# Altium PCB Buck_Converter_PCB_4.PcbDoc
Units mm, origin at the board's own origin, x right, y up, seen from the top; angles counter-clockwise.
Board outline 150 x 100 mm, 2 copper layers (Top Layer, Bottom Layer); 59 components, 30 nets, 152 pads, 19 vias.
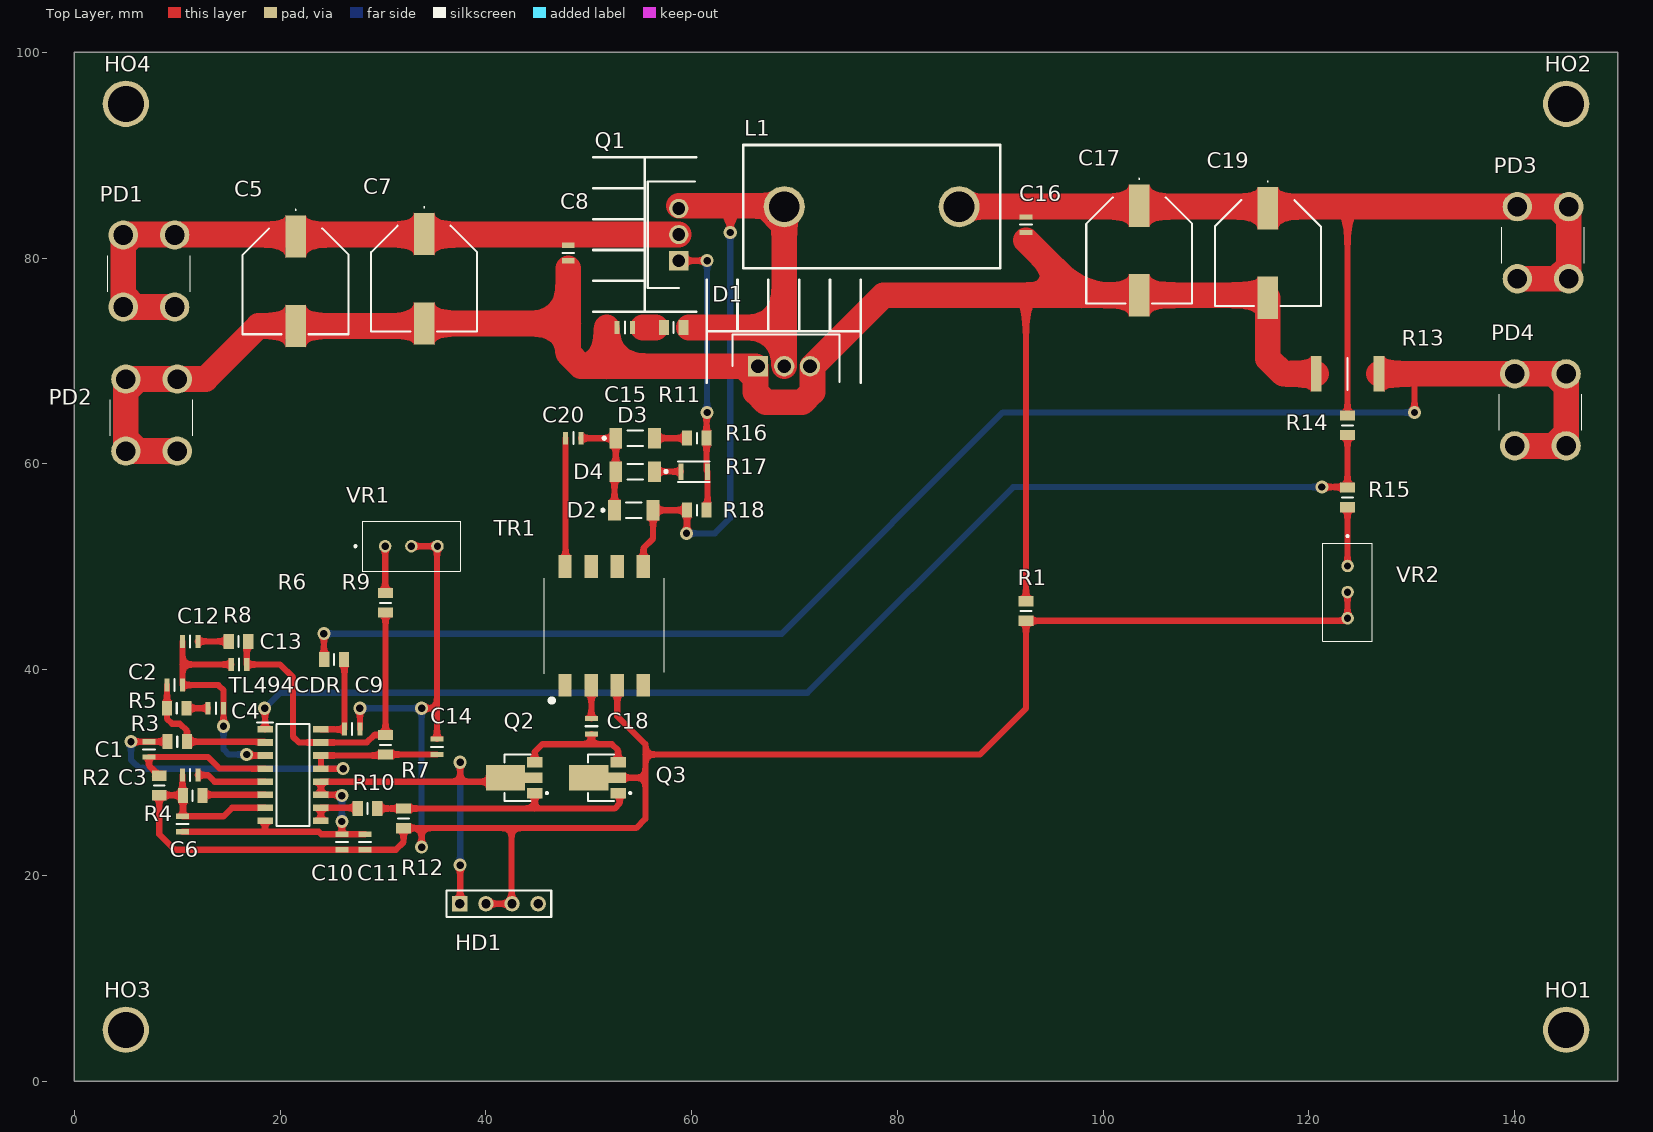
[diagram p0: Top Layer view]
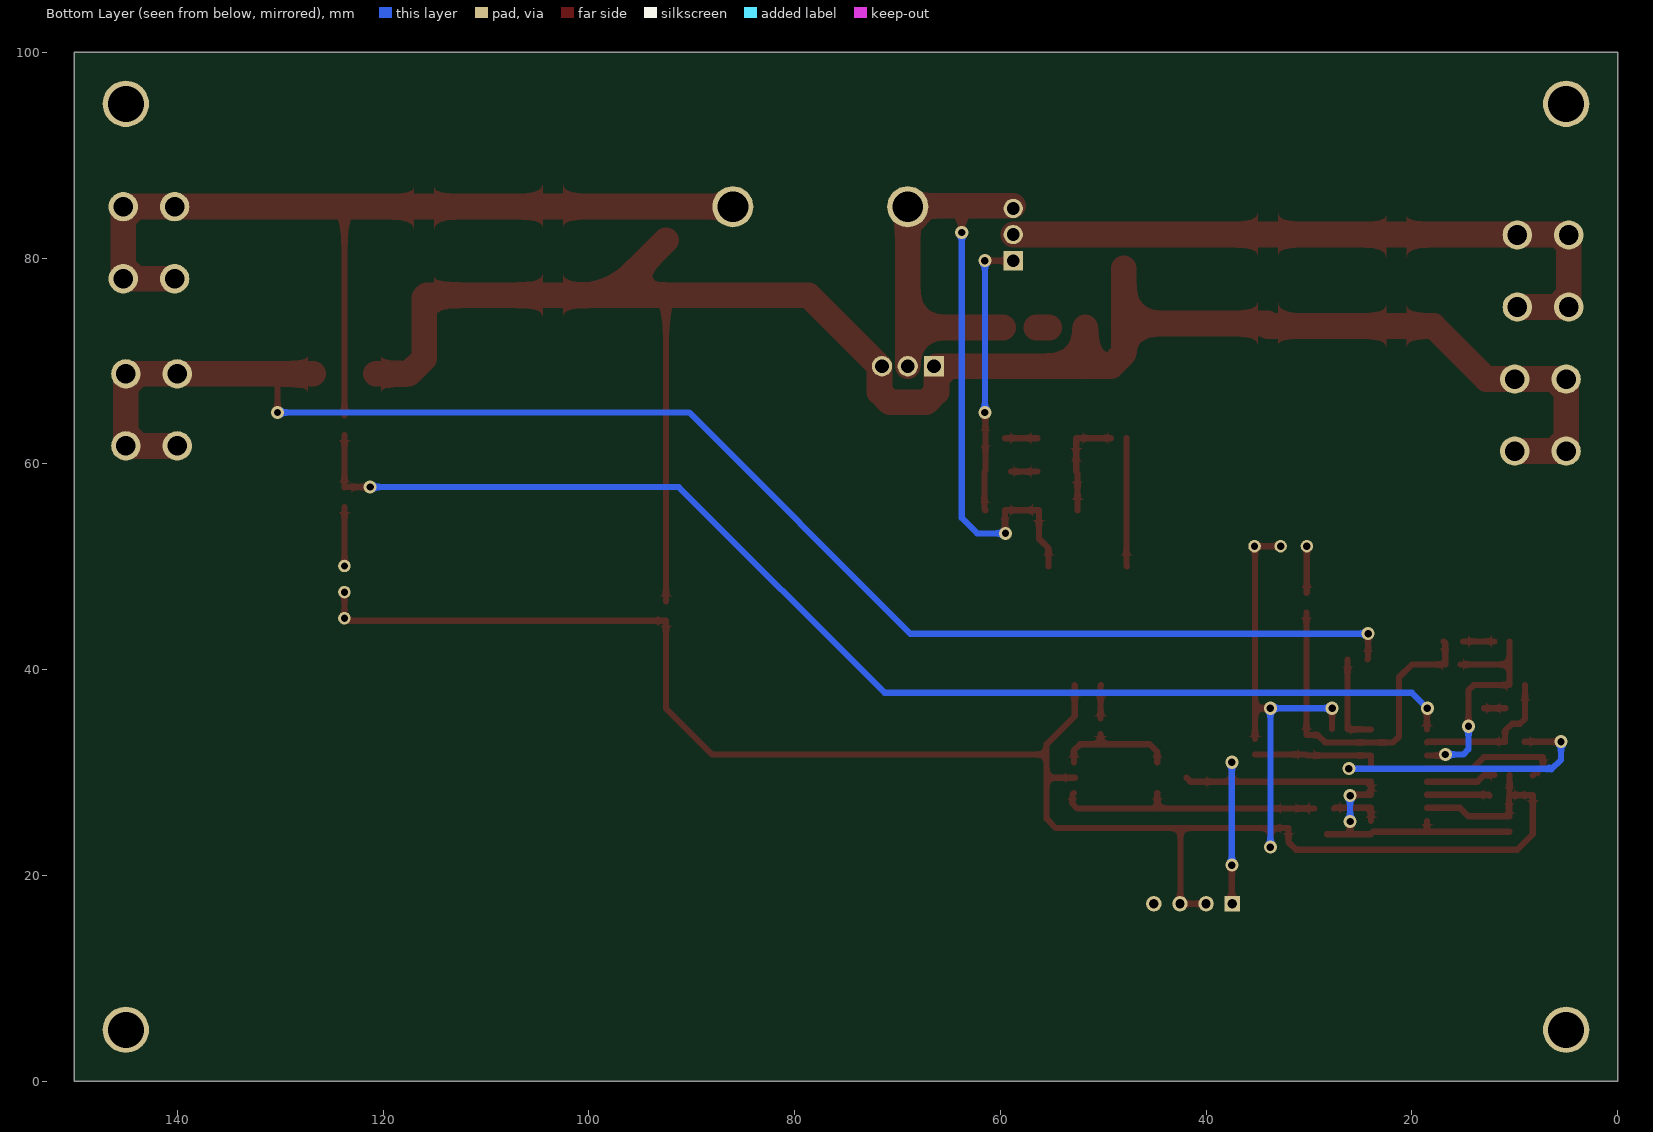
[diagram p1: Bottom Layer view, seen from below]

## Layer stack, top to bottom
Top Solder: solder mask 0.0102, Solder Resist, Dk 3.5
Top Layer: signal copper 0.0356
Dielectric 1: dielectric 0.32, FR-4, Dk 4.8
Bottom Layer: signal copper 0.0356
Bottom Solder: solder mask 0.0102, Solder Resist, Dk 3.5

## Board outline
0,0 150,0 150,100 0,100

## Design rules (kind name [scope] priority, off if disabled: settings)
Clearance [All] p1: gap=0.01
ComponentClearance [All] p1: gap=0.01 collisioncheckmode=3 verticalgap=0.254 showdistances=FALSE
HoleSize [All] p1: absolutevalues=TRUE maxlimit=4 minlimit=0.001 maxpercent=80.000 minpercent=20.000
MinimumSolderMaskSliver [All] p1: minsoldermaskwidth=0.001
PolygonConnect [All] p1: connectstyle=Relief reliefconductorwidth=0.254 reliefentries=4 polygonreliefangle="90 Angle" airgapwidth=0.254
RoutingVias [All] p1: holewidth=0.711 width=1.27 viastyle="Through Hole" minholewidth=0.711 minwidth=1.27 maxholewidth=0.711 maxwidth=1.27
SilkToSilkClearance [All] p1: silktosilkclearance=0.001
SilkToSolderMaskClearance [IsPad] p1: minsilkscreentomaskgap=0.001 clearancetoexposedcopper=TRUE
SolderMaskExpansion [All] p1: expansion=0.102
Width [All] p1: maxlimit=2.5 minlimit=0.254 preferedwidth=0.254
25 further rules are at their usual default settings.

## Components (designator, comment, footprint, x,y, rotation, side; value= is the part's Value field where it differs from the comment)
C1 "1uF" Capacitors_SMD_0805 7.25,32.25 r90 top
C2 "150pF" Capacitors_SMD_0805 9.75,38.5 r0 top
C3 "1nF" Capacitors_SMD_0805 11.25,29.75 r0 top
C4 "100nF" Capacitors_SMD_0805 13.75,36.25 r0 top
C5 "330uf" Capacitors_SMD_D10 21.5,77.75 r270 top
C6 "1uF" Capacitors_SMD_0805 10.5,25 r270 top
C7 "330uf" Capacitors_SMD_D10 34,78 r270 top
C8 "100nF" Capacitors_SMD_0805 48,80.5 r270 top
C9 "1nF" Capacitors_SMD_0805 27,34.25 r180 top
C10 "1uF" Capacitors_SMD_0805 26,23.25 r90 top
C11 "100nF" Capacitors_SMD_0805 28.25,23.25 r90 top
C12 "100nF" Capacitors_SMD_0805 11.25,42.75 r180 top
C13 "680pF" Capacitors_SMD_0805 16,40.5 r0 top
C14 "100nF" Capacitors_SMD_0805 35.25,32.5 r90 top
C15 "1nF" Capacitors_SMD_0805 53.5,73.25 r180 top
C16 "100nF" Capacitors_SMD_0805 92.5,83.25 r90 top
C17 "330uF" Capacitors_SMD_D10 103.5,80.75 r270 top
C18 "100nF" Capacitors_SMD_0805 50.25,34.5 r90 top
C19 "330uF" Capacitors_SMD_D10 116,80.5 r270 top
C20 "100nF" Capacitors_SMD_0805 48.5,62.5 r0 top
D1 "STPS20H100C" TO-220_Diode 69,69.5 r0 top
D2 "1N4148" 1N4148 54.375,55.5 r0 top
D3 "1N4148" 1N4148 54.5,62.5 r0 top
D4 "1N4148" 1N4148 54.5,59.25 r180 top
HD1 "Header 4" HDR1X4 37.46,17.25 r0 top
HO1 "HOLE" Hole 145,5 r0 top
HO2 "HOLE" Hole 145,95 r0 top
HO3 "HOLE" Hole 5,5 r0 top
HO4 "HOLE" Hole 5,95 r0 top
L1 "Inductor" Inductor 77.5,85 r0 top
PD1 "Terminal" Terminal 4.75,75.25 r0 top
PD2 "Terminal" Terminal 5,61.25 r0 top
PD3 "Terminal" Terminal 140.25,78 r0 top
PD4 "Terminal" Terminal 140,61.75 r0 top
Q1 "N-MOSFET" TO-220)N-MOSFET 58.75,82.29 r90 top
Q2 "2SCR552P" 2SCR552P 42.75,29.5 r90 top
Q3 "2SAR552P" 2SAR552P 50.85,29.5 r90 top
R1 "0R" RESISTOR_SMD_0805 92.5,45.7 r270 top
R2 "1K" RESISTOR_SMD_0805 8.25,28.75 r90 top
R3 "3K" RESISTOR_SMD_0805 10,33 r0 top
R4 "10K" RESISTOR_SMD_0805 11.5,27.75 r0 top
R5 "20K" RESISTOR_SMD_0805 9.95,36.25 r180 top
R6 "1K" RESISTOR_SMD_0805 25.25,41 r0 top
R7 "24K" RESISTOR_SMD_0805 30.25,32.7 r90 top
R8 "10K" RESISTOR_SMD_0805 15.95,42.75 r180 top
R9 "22R" RESISTOR_SMD_0805 30.25,46.5 r90 top
R10 "22R" RESISTOR_SMD_0805 28.5,26.5 r0 top
R11 "10R" RESISTOR_SMD_0805 58.25,73.25 r0 top
R12 "1K" RESISTOR_SMD_0805 32,25.55 r90 top
R13 "0R01" RESISTOR_SMD_2512 123.75,68.75 r0 top
R14 "15K" RESISTOR_SMD_0805 123.75,63.75 r90 top
R15 "1K5" RESISTOR_SMD_0805 123.75,56.75 r90 top
R16 "4R7" RESISTOR_SMD_0805 60.5,62.5 r0 top
R17 "4R7" RESISTOR_SMD_1206 60.25,59.25 r0 top
R18 "10K" RESISTOR_SMD_0805 60.5,55.5 r0 top
TL494CDR "TL494CDR" TL494CDR 21.25,29.75 r0 top
TR1 "B78307A2276A003" B78307A2276A003 51.5,44.25 r0 top
VR1 "5K" Baoter_3296 30.21,52 r180 top
VR2 "5K" Baoter_3296 123.75,50.08 r90 top

## Footprints (in the part's own frame and the unit in brackets; to place one, negate y for a bottom-side part, rotate by r counter-clockwise, add the part's x,y. Pads: shape width x height; smd on the part's side, far side on the other; paste and mask are expansions set on the pad)
1N4148 [mm]
  rect 1.25x2 smd: A(1.875,0) K(-1.875,0)
  silkscreen extent -3.12,-0.75 0.75,0.75, body extent -1.85,-0.8 1.85,0.8, height 1.6
2SAR552P [mm]
  rect 1x1.5 smd: 1(-1.5,-2) 3(1.5,-2)
  rect 2.5x3.8 smd: 2(0,0.85)
  rect 1x1.7 smd: 2(0,-1.9)
  silkscreen extent -2.25,-3.27 2.25,0.92, body extent -2.27,-2.27 2.27,1.73, height 1.6
2SCR552P [mm]
  rect 1x1.5 smd: 1(-1.5,-2) 3(1.5,-2)
  rect 2.5x3.8 smd: 2(0,0.85)
  rect 1x1.7 smd: 2(0,-1.9)
  silkscreen extent -2.25,-3.27 2.25,0.92, body extent -2.27,-2.27 2.27,1.73, height 1.6
B78307A2276A003 [mm]
  rect 1.3x2.21 smd: 1(-3.81,-5.77) 2(-1.27,-5.77) 3(1.27,-5.77) 4(3.81,-5.77) 5(3.81,5.77) 6(1.27,5.77) 7(-1.27,5.77) 8(-3.81,5.77)
  silkscreen extent -5.85,-7.3 5.85,4.65, body extent -5.94,-6.79 5.76,6.37, height 11.35
Baoter_3296 [mm]
  round 1.217 hole 0.71: 1(0,0) 2(-2.54,0) 3(-5.08,0)
  silkscreen extent -7.3,-2.41 3,2.42
Capacitors_SMD_0805 [mm]
  rect 0.5x1.25 smd: 1(-0.75,0) 2(0.75,0)
  silkscreen extent 0,-0.58 0,0.58
Capacitors_SMD_D10 [mm]
  rect 4.1x2 smd: 1(-4.35,0) 2(4.35,0)
  silkscreen extent -7,-5.15 5.15,5.15
HDR1X4 [mm] "Connector; Header; 4 Position"
  rect 1.5x1.5 hole 0.9: 1(0,0)
  round 1.5 hole 0.9: 2(2.54,0) 3(5.08,0) 4(7.62,0)
  silkscreen extent -1.27,-1.27 8.89,1.27
Hole [mm]
  round 4.5 hole 3.5: 1(0,0)
Inductor [mm]
  round 4 hole 3: 1(-8.5,0) 2(8.5,0)
  silkscreen extent -12.5,-6 12.5,6
RESISTOR_SMD_0805 [mm]
  rect 1x1.45 smd: 1(-0.95,0) 2(0.95,0)
  silkscreen extent 0,-0.53 0,0.53
RESISTOR_SMD_1206 [mm]
  rect 0.5x1.6 smd: 1(-1.3,0) 2(1.3,0)
  silkscreen extent -1.6,-1 1.5,1
RESISTOR_SMD_2512 [mm]
  rect 1.05x3.45 smd: 1(-3.05,0) 2(3.05,0)
  silkscreen extent 0,-1.55 0,1.55
Terminal [mm]
  round 2.85 hole 1.9: 1(0,0) 1(0,7) 1(5,0) 1(5,7)
  silkscreen extent -1.5,1.5 6.5,5
TL494CDR [mm]
  rect 1.525x0.65 smd: 1(-2.712,4.445) 2(-2.712,3.175) 3(-2.712,1.905) 4(-2.712,0.635) 5(-2.712,-0.635) 6(-2.712,-1.905) 7(-2.712,-3.175) 8(-2.712,-4.445) 9(2.712,-4.445) 10(2.712,-3.175) 11(2.712,-1.905) 12(2.712,-0.635) 13(2.712,0.635) 14(2.712,1.905) 15(2.712,3.175) 16(2.712,4.445)
  silkscreen extent -3.47,-4.95 1.6,5.12
TO-220)N-MOSFET [mm]
  rect 1.875x1.875 / inner round 1.875 / far side rect 1.875x1.875 hole 1.25: 1(-2.54,0)
  round 1.875 hole 1.25: 2(0,0) 3(2.54,0)
  silkscreen extent -7.5,-1.7 7.5,8.3
TO-220_Diode [mm]
  rect 1.98x1.98 / inner round 1.98 / far side rect 1.98x1.98 hole 1.32: A1(-2.55,0)
  round 1.98 hole 1.32: A2(2.5,0) K(0,0)
  silkscreen extent -7.55,-1.6 7.45,8.4

## Part data
C1: library part C1, "SMD_0805"
C2: library part C2, "SMD_0805"
C3: library part C3, "SMD_0805"
C4: library part C4, "SMD_0805"
C5: library part C5, "SMD_D10"
C6: library part C6, "SMD_0805"
C7: library part C7, "SMD_D10"
C8: library part C8, "SMD_0805"
C9: library part C9, "SMD_0805"
C10: library part C10, "SMD_0805"
C11: library part C11, "SMD_0805"
C12: library part C12, "SMD_0805"
C13: library part C13, "SMD_0805"
C14: library part C14, "SMD_0805"
C15: library part C15, "SMD_0805"
C16: library part C16, "SMD_0805"
C17: library part C17, "SMD_D10"
C18: library part C18, "SMD_0805"
C19: library part C19, "SMD_D10"
C20: library part C20, "SMD_0805"
D1: library part D1, "Schottky"
D2: library part D2, "Diode"
D3: library part D3, "Diode"
D4: library part D4, "Diode"
HD1: "Header, 4-Pin"
HO1: library part HO1
HO2: library part HO2
HO3: library part HO3
HO4: library part HO4
L1: library part L1
PD1: library part PD1
PD2: library part PD2
PD3: library part PD3
PD4: library part PD4
Q1: library part Q1
Q2: library part Q2, "NPN-BJT"
Q3: library part Q3, "PNP-BJT"
R1: library part R1, "SMD_0805"
R2: library part R2, "SMD_0805"
R3: library part R3, "SMD_0805"
R4: library part R4, "SMD_0805"
R5: library part R5, "SMD_0805"
R6: library part R6, "SMD_0805"
R7: library part R7, "SMD_0805"
R8: library part R8, "SMD_0805"
R9: library part R9, "SMD_0805"
R10: library part R10, "SMD_0805"
R11: library part R11, "SMD_0805"
R12: library part R12, "SMD_0805"
R13: library part R13, "SMD_2512"
R14: library part R14, "SMD_0805"
R15: library part R15, "SMD_0805"
R16: library part R16, "SMD_0805"
R17: library part R17, "SMD_1206"
R18: library part R18, "SMD_0805"
TL494CDR: "PWM_controller"
TR1: library part TR1, "SMDTransformers"
VR1: library part VR1, "Baoter_3296"
VR2: library part VR2, "Baoter_3296"

## Via types
v1: diameter 1.27, hole 0.711, Top Layer to Bottom Layer, 19 vias

## Nets (pads, with @x,y where several pads share a name; then routed paths per layer and width w, separated by ;. In a path a pad name is that pad's centre, name@x,y a point inside that pad or via, vN(x,y) a via of type N, cw(c..) or ccw(c..) an arc to the next point about the centre after c; other vN are vias at no path point)
5V: C1.2 C14.1 R3.1 R7.1 TL494CDR.13 TL494CDR.14 | length 40.7
  Top Layer w0.6: v1(5.5,33) C1.2 R3.1 ; TL494CDR.13@24.077,30.5 TL494CDR.13 TL494CDR.14 30.155,31.655 R7.1 C14.1 ; TL494CDR.13@24.708,30.375 v1(26.125,30.375)
  Bottom Layer w0.6: v1(5.5,33) 5.5,31.25 6.448,30.302 6.651,30.505 6.831,30.325 6.881,30.375 v1(26.125,30.375)
12V: C6.2 C10.2 C11.2 HD1.1 Q2.2 TL494CDR.8 TL494CDR.11 TL494CDR.12 | length 59.8
  Top Layer w0.6: C6.2 18.5,24.25 ; TL494CDR.8 18.538,24.288 18.5,24.25 ; v1(26,25.25) C10.2 ; v1(26,27.75) 25.905,27.845 TL494CDR.11 TL494CDR.12 37.5,29.115 ; C11.2 C10.2 ; HD1.1 37.5,17.29 v1(37.5,21) ; v1(37.5,31) 37.5,29.115 ; Q2.2@41.9,29.5 41.515,29.115 37.5,29.115 ; 18.5,24.25 23.75,24.25 24,24 C10.2
  Bottom Layer w0.6: v1(26,25.25) v1(26,27.75) ; v1(37.5,21) v1(37.5,31)
AG: C3.1 C6.1 C9.1 C10.1 C11.1 C14.2 HD1.2 HD1.3 Q3.2 R1.2 R2.1 R4.1 R12.1 TL494CDR.7 TR1.3 VR1.2 VR1.3 VR2.2 VR2.3 | length 222.5
  Top Layer w0.6: C3.1 10.5,27.8 R2.1 8.25,24 9.75,22.5 C10.1 C11.1 31.25,22.5 32,23.25 R12.1 33.75,24.6 ; R4.1 10.55,25.8 C6.1 14.5,25.75 15.325,26.575 TL494CDR.7 ; C9.1 v1(27.75,36.25) ; VR1.2 VR1.3 35.25,51.96 35.25,36.25 ; v1(33.75,22.75) 33.75,24.6 ; v1(33.75,36.25) 35.25,36.25 ; C14.2 35.25,36.25 ; HD1.2 HD1.3 42.5,17.29 42.5,24.6 ; Q3.2@52.75,29.5 55.5,29.5 ; TR1.3 52.77,35.48 55.5,32.75 55.5,31.75 ; VR2.2 VR2.3 123.5,44.75 R1.2 92.5,36.25 88,31.75 55.5,31.75 ; 33.75,24.6 42.5,24.6 ; 42.5,24.6 54.6,24.6 55.5,25.5 55.5,29.5 ; 55.5,29.5 55.5,31.75
  Bottom Layer w0.6: v1(27.75,36.25) v1(33.75,36.25) v1(33.75,22.75)
CS: PD4.1 R6.1 R13.2 | length 151.5
  Top Layer w0.6: v1(24.25,43.5) 24.25,41.05 R6.1 ; v1(130.25,65) 130.25,68.5 130.5,68.75
  Top Layer w2.5: R13.2 130.5,68.75 140,68.75 145,68.75 145,61.75 PD4.1@140,61.75
  Bottom Layer w0.6: v1(24.25,43.5) 68.75,43.5 90.25,65 v1(130.25,65)
GATE: Q1.1 R16.2 R17.2 R18.2 | length 27.1
  Top Layer w0.6: Q1.1 v1(61.5,79.75) ; R18.2 61.55,55.6 R17.2 61.45,59.35 R16.2 61.45,64.95 v1(61.5,65)
  Bottom Layer w0.6: v1(61.5,65) v1(61.5,79.75)
NetC1_1: C1.1 R2.2 TL494CDR.4 | length 14
  Top Layer w0.6: R2.2 7.25,30.7 C1.1 13,31.5 14.115,30.385 TL494CDR.4
NetC2_1: C2.1 R3.2 R5.2 TL494CDR.2 | length 14.4
  Top Layer w0.6: C2.1 R5.2 9,35.25 9.5,34.75 10.25,34.75 10.95,34.05 R3.2 18.463,33 TL494CDR.2
NetC2_2: C2.2 C4.2 C12.2 C13.1 TL494CDR.3 | length 23.2
  Top Layer w0.6: C12.2 10.5,40.5 ; v1(14.5,34.5) C4.2 14.5,38 14,38.5 C2.2 10.5,40.5 ; C13.1 10.5,40.5 ; v1(16.75,31.75) 16.845,31.655 TL494CDR.3
  Bottom Layer w0.6: v1(14.5,34.5) 14.5,32.25 15,31.75 v1(16.75,31.75)
NetC3_2: C3.2 TL494CDR.5 | length 6.8
  Top Layer w0.6: C3.2 13,29.75 13.635,29.115 TL494CDR.5
NetC4_1: C4.1 R5.1 | length 2.1
  Top Layer w0.6: R5.1 C4.1
NetC5_1: C5.1 C7.1 C8.1 PD1.1 Q1.2 | length 66
  Top Layer w2.5: PD1.1@9.75,75.25 4.75,75.25 4.75,82.25 4.79,82.29 Q1.2
NetC9_2: C9.2 R6.2 TL494CDR.16 | length 9.1
  Top Layer w0.6: TL494CDR.16 26.195,34.195 C9.2 R6.2@26.25,41
NetC12_1: C12.1 R8.2 | length 3
  Top Layer w0.6: C12.1 R8.2
NetC13_2: C13.2 R7.2 R8.1 R9.1 TL494CDR.15 | length 34.5
  Top Layer w0.6: R8.1 16.75,42.6 C13.2 20,40.5 21.25,39.25 21.25,33.5 21.825,32.925 TL494CDR.15 28.425,32.925 29.15,33.65 R7.2 R9.1
NetC15_1: C15.1 R11.1 | length 1.2
  Top Layer w2.5: 55.25,73.25 56.5,73.25
NetC16_2: C16.2 C17.1 C19.1 L1.2 PD3.1 R14.2 | length 91.6
  Top Layer w0.6: R14.2 123.75,85.01
  Top Layer w2.5: L1.2 86,85.01 103.5,85.01 123.75,85.01 PD3.1@145.25,85.01 ; PD3.1@140.25,78 145.25,78 PD3.1@145.25,85
NetC18_1: C18.1 Q2.3 Q3.3 | length 11.8
  Top Layer w0.6: Q2.3 44.75,32 45.5,32.75 50.25,32.75 ; C18.1 50.25,32.75 ; Q3.3 52.85,32.15 52.25,32.75 50.25,32.75
NetC18_2: C18.2 TR1.2 | length 3.2
  Top Layer w0.6: TR1.2 50.25,38.46 C18.2
NetC20_1: C20.1 TR1.8 | length 12.5
  Top Layer w0.6: TR1.8 47.75,50.08 C20.1
NetC20_2: C20.2 D2.K D3.K D4.A | length 10.4
  Top Layer w0.6: C20.2 D3.K D4.A 52.5,59.125 D2.K
NetD3_A: D3.A R16.1 | length 3.2
  Top Layer w0.6: D3.A R16.1
NetD4_K: D4.K R17.1 | length 2.6
  Top Layer w0.6: D4.K R17.1
NetQ2_1: Q2.1 Q3.1 R10.2 R12.2 | length 26.3
  Top Layer w0.6: R10.2 R12.2 44.75,26.5 ; Q2.1 44.75,26.5 ; Q3.1 53,27.85 53,27 52.5,26.5 45.25,26.5 44.75,26.5
NetR4_2: R4.2 TL494CDR.6 | length 6.1
  Top Layer w0.6: R4.2 12.545,27.845 TL494CDR.6
NetR9_2: R9.2 VR1.1 | length 4.6
  Top Layer w0.6: VR1.1 30.21,47.49 R9.2
NetR10_1: R10.1 TL494CDR.9 TL494CDR.10 | length 4.9
  Top Layer w0.6: TL494CDR.9 TL494CDR.10 27.475,26.575 R10.1
NetR15_1: R15.1 VR2.1 | length 5.7
  Top Layer w0.6: VR2.1 R15.1
PG: C5.2 C7.2 C8.2 C15.2 C16.1 C17.2 C19.2 D1.A1 D1.A2 PD2.1 R1.1 R13.1 | length 195
  Top Layer w0.6: R1.1 92.5,76.4
  Top Layer w2.5: PD2.1@10,61.25 5,61.25 5,68.25 10,68.25 12.75,68.25 17.9,73.4 C5.2 C7.2@34,73.4 ; C7.2 48,73.65 ; 48,79 48,73.65 ; 51.75,73.25 51.75,69.5 ; 92.5,81.75 97.85,76.4 ; R13.1 117.5,68.75 116,70.25 C19.2 115.75,76.4 C17.2 97.85,76.4 ; 48,73.65 48,70.75 49.25,69.5 51.75,69.5 ; 51.75,69.5 66.2,69.5 66.2,67 67.2,66 70.75,66 71.75,67 71.75,69.5 78.65,76.4 92.5,76.4 97.85,76.4
REF: D1.K D2.A L1.1 Q1.3 R11.2 R18.1 TR1.5 | length 81.7
  Top Layer w0.6: TR1.5 55.31,51.81 56.25,52.75 D2.A R18.1 59.55,53.3 v1(59.5,53.25) ; v1(63.75,82.5) 63.75,85.08
  Top Layer w2.5: Q1.3@58.75,85.08 63.75,85.08 68.92,85.08 L1.1 D1.K ; 59.75,73.25 69,73.25
  Bottom Layer w0.6: v1(59.5,53.25) 62.25,53.25 63.75,54.75 v1(63.75,82.5)
VFB: R14.1 R15.2 TL494CDR.1 | length 121.3
  Top Layer w0.6: v1(18.5,36.25) 18.538,36.212 TL494CDR.1 ; v1(121.25,57.75) 123.7,57.75 R15.2 R14.1
  Bottom Layer w0.6: v1(18.5,36.25) 20,37.75 71.25,37.75 91.25,57.75 v1(121.25,57.75)
pads on no net: HD1.4 HO1.1 HO2.1 HO3.1 HO4.1 TR1.1 TR1.4 TR1.6 TR1.7

## Other copper
Top Layer:
  region net PG: 6.811,67.104 6.457,67.457 5.75,66.75 6.104,66.396
  region net PG: 6.146,63.061 5.793,62.707 6.5,62 6.854,62.354
  region net NetC5_1: 5.896,77.061 5.543,76.707 6.25,76 6.604,76.354
  region net NetC5_1: 5.439,80.896 5.793,80.543 6.5,81.25 6.146,81.604
  region net NetC16_2: 143.439,79.146 143.793,78.793 144.5,79.5 144.146,79.854
  region net NetC16_2: 144.104,83.189 144.457,83.543 143.75,84.25 143.396,83.896
  region net CS: 143.854,66.939 144.207,67.293 143.5,68 143.146,67.646
  region net CS: 144.104,63.146 143.75,63.5 143.043,62.793 143.396,62.439
  region net REF: 66.816,84.316 66.463,83.963 67.838,82.588 68.191,82.941
  region net PG: 64.646,68.811 64.293,68.457 65,67.75 65.354,68.104